# Altium PCB 1.28inchLCD_V1.1.PcbDoc
Units mil, origin at the board's own origin, x right, y up, seen from the top; angles counter-clockwise.
Board outline 1401.56 x 1489.37 mil, 2 copper layers (Top Layer, Bottom Layer); 11 components, 14 nets, 55 pads, 90 vias.
Unrouted connection lines stored in the file: 76.
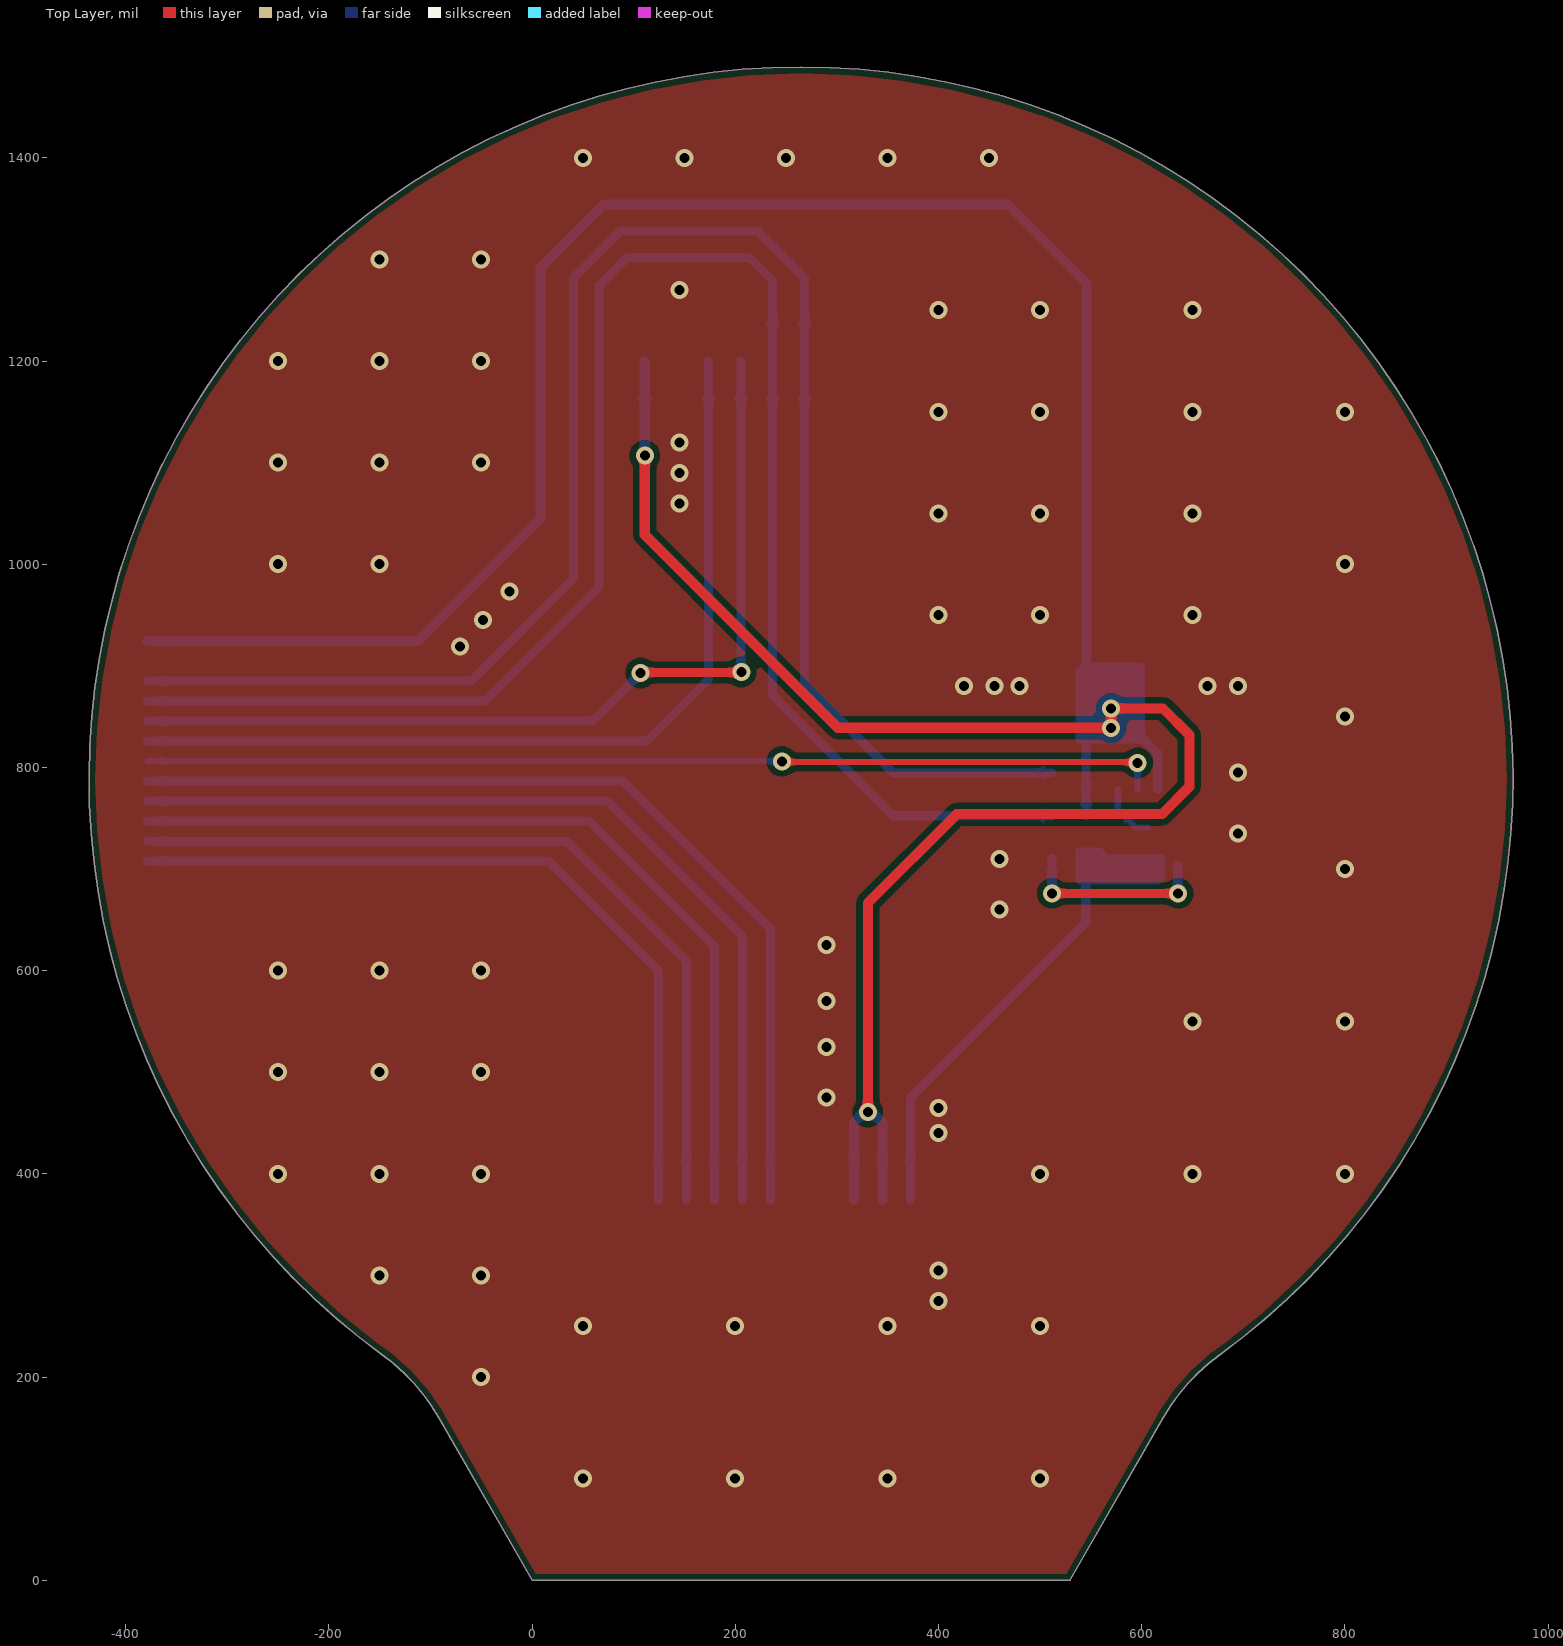
[diagram p0: Top Layer view]
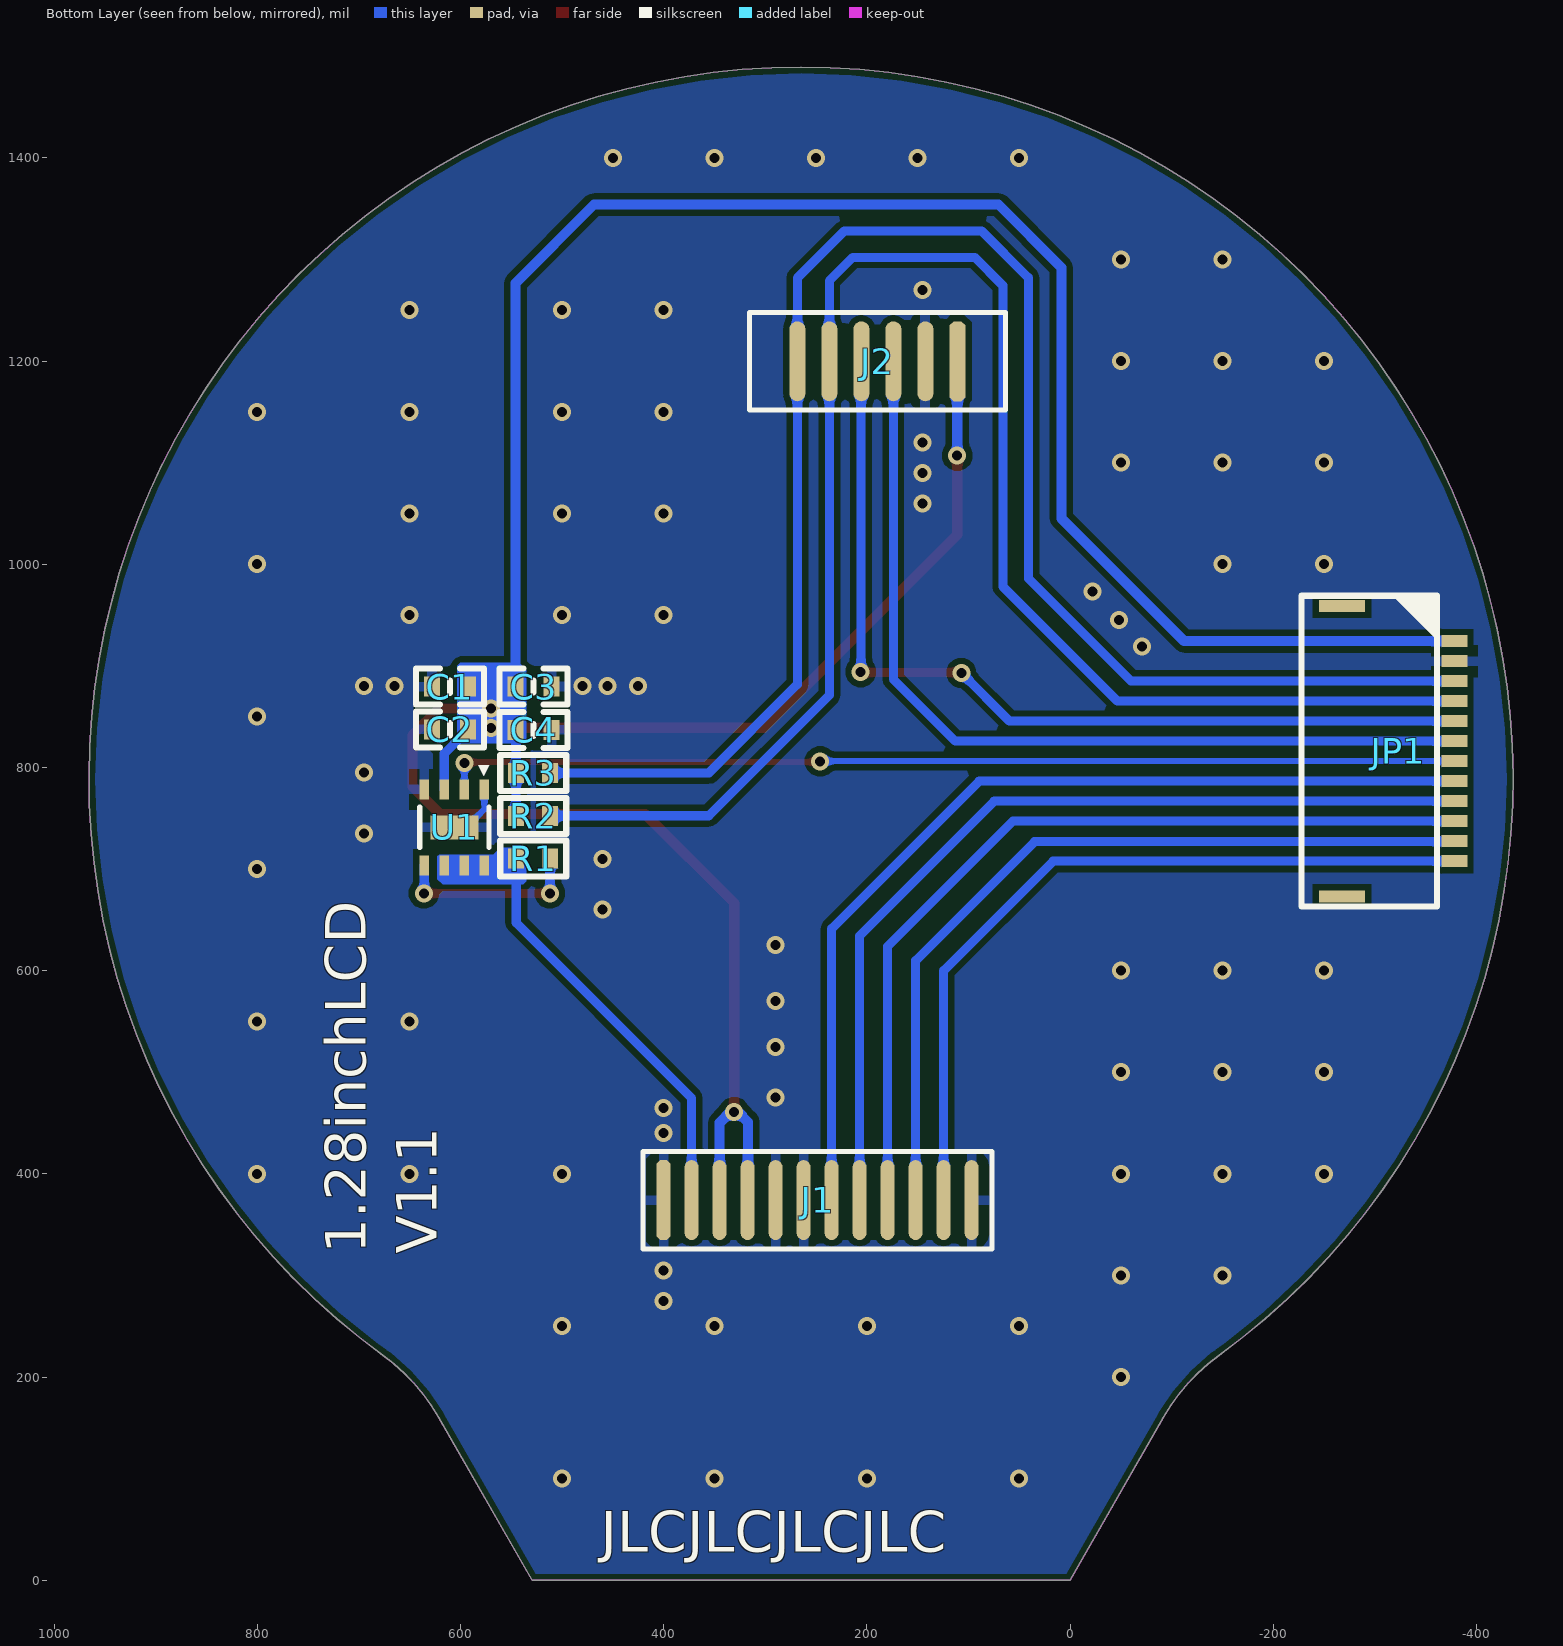
[diagram p1: Bottom Layer view, seen from below]
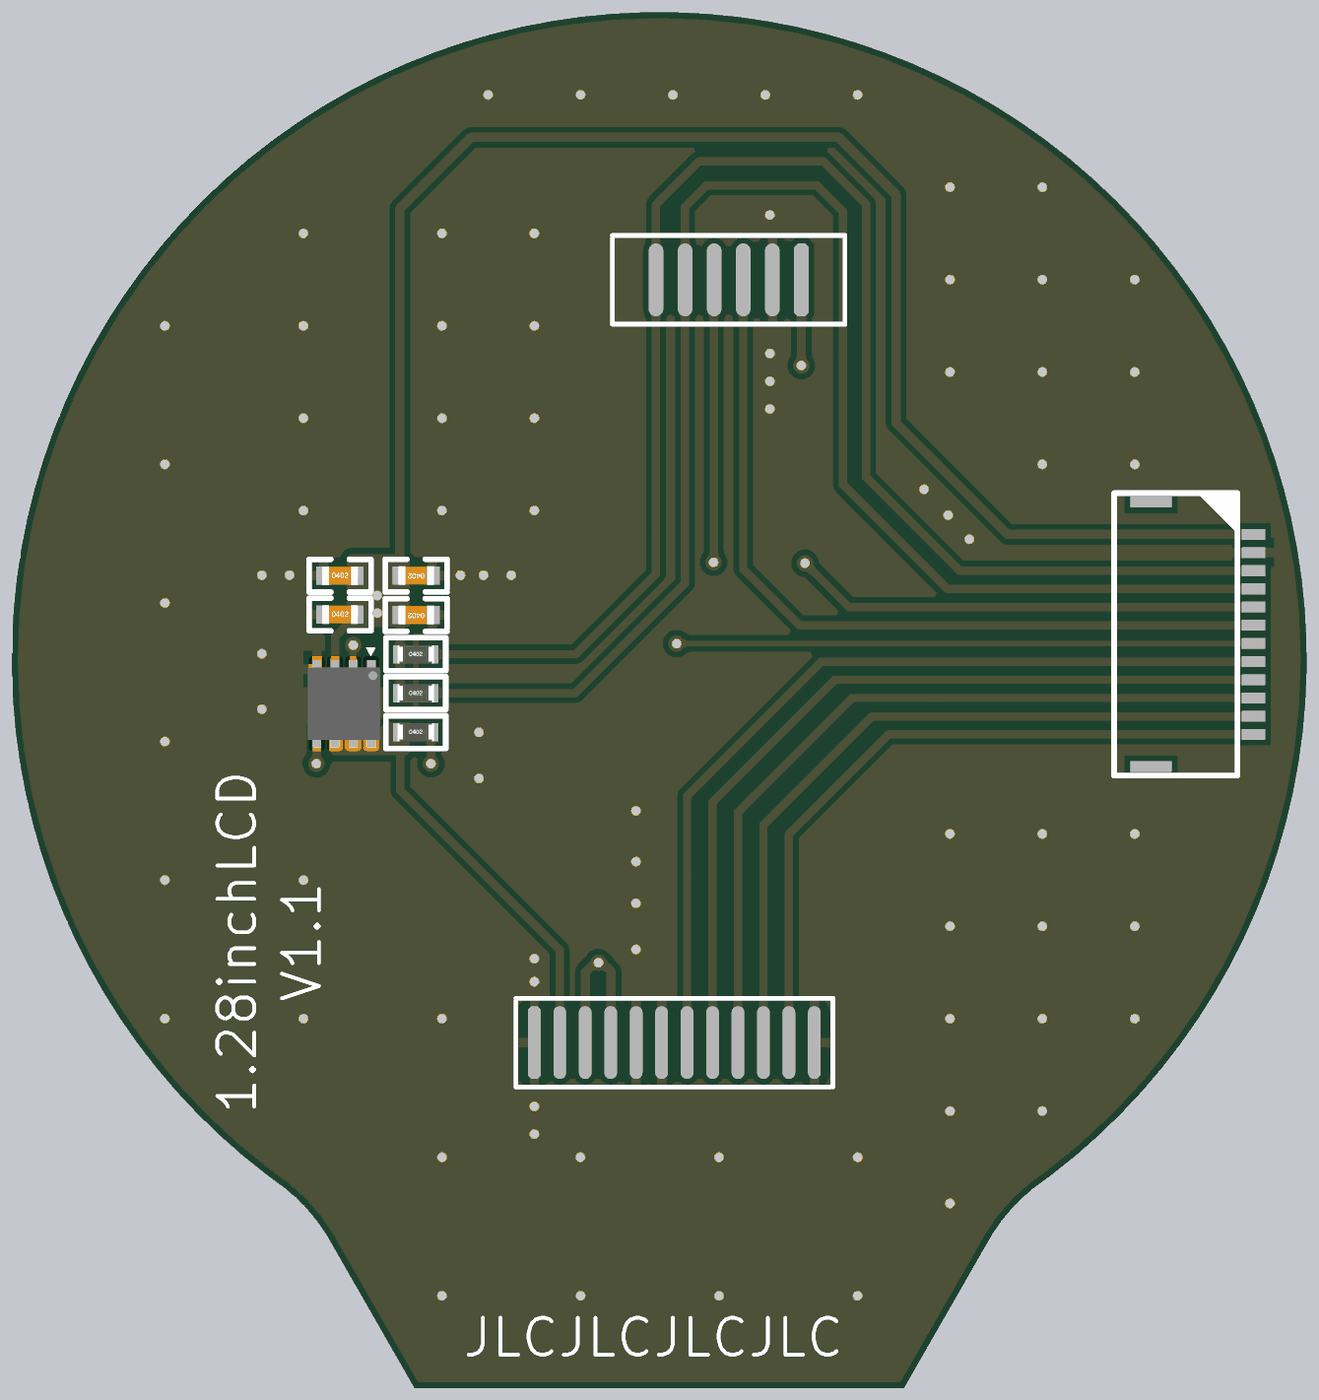
[diagram p2: 3D render of the assembled board from below, using the file's embedded part models]

## Layer stack, top to bottom
Top Solder: solder mask 0.4, Solder Resist, Dk 3.5
Top Layer: signal copper 1.4
Dielectric 1: dielectric 12.6, FR-4, Dk 4.8
Bottom Layer: signal copper 1.4
Bottom Solder: solder mask 0.4, Solder Resist, Dk 3.5

## Board outline
0,0 -91.81,160.1 ccw(c-262.58,62.18) -146.93,221.48 cw(c264.76,788.58) 676.46,221.48 ccw(c792.1,62.18) 621.34,160.1 529.53,0

## Design rules (kind name [scope] priority, off if disabled: settings)
Clearance [All] p1: gap=6 ignorepadtopadclearanceinfootprint=FALSE
HoleToHoleClearance [All] p1: gap=0 allowstackedmicrovias=TRUE
MinimumSolderMaskSliver [All] p1: minsoldermaskwidth=0
PolygonConnect [All] p1: thpad.connectstyle=Relief thpad.reliefconductorwidth=10 thpad.reliefentries=4 thpad.polygonreliefangle="90 Angle" thpad.airgapwidth=10 smdpad.connectstyle=Relief smdpad.reliefconductorwidth=10 smdpad.reliefentries=4 smdpad.polygonreliefangle="90 Angle" smdpad.airgapwidth=10 via.connectstyle=Direct via.reliefconductorwidth=10 via.reliefentries=4 via.polygonreliefangle="90 Angle" via.airgapwidth=10
RoutingVias [All] p1: holewidth=9.84 width=17.72 viastyle="Through Hole" minholewidth=9.84 minwidth=17.72 maxholewidth=23.62 maxwidth=31.5
SilkToSilkClearance [All] p1: silktosilkclearance=0
SilkToSolderMaskClearance [IsPad] p1: minsilkscreentomaskgap=0 clearancetoexposedcopper=TRUE
SolderMaskExpansion [IsVia] p1: expansion=4 istentingtop=TRUE useseparateexpansions=TRUE expansionbottom=4 istentingbottom=TRUE
Width [All] p1: maxlimit=30 minlimit=6 preferedwidth=6
26 further rules are at their usual default settings.

## Components (designator, comment, footprint, x,y, rotation, side; value= is the part's Value field where it differs from the comment)
C1 "4.7uF" C0402_L 610.32,879.47 r180 bottom
C2 "0.1uF" C0402_L 610.32,837.47 r180 bottom
C3 "4.7uF" C0402_L 527.97,879.62 r0 bottom
C4 "0.1uF" C0402_L 527.97,836.93 r0 bottom
J1 "1.28'LCD" 1.28‘LCD 248.43,374.14 r0 bottom
J2 "1.28'Touch" 1.28’Touch 189.57,1199.73 r0 bottom
JP1 "12P-FPC-1.0H" FPC05-10-12-RL-MA-G -323,816 r270 bottom
R1 "NC/0R" R0402_L 528.34,710.22 r180 bottom
R2 "4.7K" R0402_L 528.34,752.37 r180 bottom
R3 "4.7K" R0402_L 528.34,794.52 r180 bottom
U1 "AW9364DNR" DFN2X2-8L 606,741 r270 bottom

## Footprints (in the part's own frame and the unit in brackets; to place one, negate y for a bottom-side part, rotate by r counter-clockwise, add the part's x,y. Pads: shape width x height; smd on the part's side, far side on the other; paste and mask are expansions set on the pad)
1.28‘LCD [mm]
  oct 0.35x2 smd: 1(3.85,0)
  oval 0.35x2 smd: 2(3.15,0) 3(2.45,0) 4(1.75,0) 5(1.05,0) 6(0.35,0) 7(-0.35,0) 8(-1.05,0) 9(-1.75,0) 10(-2.45,0) 11(-3.15,0) 12(-3.85,0)
  silkscreen extent -4.36,-1.22 4.36,1.22
1.28’Touch [mm]
  oct 0.4x2 smd: 1(-2,0)
  oval 0.4x2 smd: 2(-1.2,0) 3(-0.4,0) 4(0.4,0) 5(1.2,0) 6(2,0)
  silkscreen extent -3.2,-1.22 3.2,1.22
C0402_L [mm] "无极性贴片电容"
  rect 0.4x0.5 smd: 1(-0.45,0) 2(0.45,0)
  silkscreen extent -0.85,-0.45 0.85,0.45, body extent -0.5,-0.26 0.5,0.26, height 0.54
DFN2X2-8L [mm]
  rect 0.5x0.24 smd mask+0.102: 1(-0.95,0.75) 2(-0.95,0.25) 3(-0.95,-0.25) 4(-0.95,-0.75) 5(0.95,-0.75) 6(0.95,-0.25) 7(0.95,0.25) 8(0.95,0.75)
  rect 0.6x1.2 smd mask+0.102: 9(0,0)
  silkscreen extent -1.55,-0.86 0.51,0.88, body extent -1,-1 1,1, height 0.75
FPC05-10-12-RL-MA-G [mm]
  rect 0.3x1.15 smd: 0(-3.635,-1.405) 0(3.635,-1.405)
  rect 0.3x0.65 smd: 1(-2.75,1.405) 2(-2.25,1.405) 3(-1.75,1.405) 4(-1.25,1.405) 5(-0.75,1.405) 6(-0.25,1.405) 7(0.25,1.405) 8(0.75,1.405) 9(1.25,1.405) 10(1.75,1.405) 11(2.25,1.405) 12(2.75,1.405)
  silkscreen extent -3.88,-2.42 3.88,0.97
R0402_L [mm] "1/16W贴片电阻"
  rect 0.4x0.5 smd: 1(-0.425,0) 2(0.425,0)
  silkscreen extent -0.82,-0.45 0.83,0.45, body extent -0.5,-0.25 0.5,0.25, height 0.3

## Part data
C1 C2 C3 C4: library part C, "贴片电容", BOM名称=无极性贴片电容, 联系卖家，免费查找封装=唯一出售店铺网址https://shop463601444.taobao.com
J1: "1.28寸焊接LCD屏（240*240）"
J2: "1.28寸触摸面板"
JP1: library part "Header 12", BOM名称=12P连接器, 联系卖家 免费技术支持=封装库来自淘宝卖家ID：黄晶宝石, 联系卖家 免费查找封装=唯一出售店铺网址https://shop463601444.taobao.com
R1 R2 R3: library part R, "贴片电阻", BOM名称=贴片电阻, 联系卖家，免费查找封装=唯一出售店铺网址https://shop463601444.taobao.com
U1: "并联调光背光驱动"

## Via types
v1: diameter 17.72, hole 9.84, Top Layer to Bottom Layer, tented both sides, 90 vias

## Nets (pads, with @x,y where several pads share a name; then routed paths per layer and width w, separated by ;. In a path a pad name is that pad's centre, name@x,y a point inside that pad or via, vN(x,y) a via of type N, cw(c..) or ccw(c..) an arc to the next point about the centre after c; other vN are vias at no path point)
GND: C1.1 C2.1 C3.1 C4.1 J1.1 J1.5 J1.6 J1.12 J2.2 JP1.2 U1.1 U1.4 U1.9 | length 56.6
  Bottom Layer w6: U1.1 576.47,758.72 594.19,741 U1.9
  other v1: 50,100 200,100 350,100 500,100 -50,200 50,250 200,250 350,250 500,250 400,275 -150,300 -50,300 400,305 -250,400 -150,400 -50,400 500,400 650,400 800,400 400,440 400,465 290,475 -250,500 -150,500 -50,500 290,525 650,550 800,550 290,570 -250,600 -150,600 -50,600 290,625 460,660 800,700 460,710 695,735 695,795 800,850 425,880 455,880 480,880 665,880 695,880 -71,919 -48,945 400,950 500,950 650,950 -22,973 -250,1000 -150,1000 800,1000 400,1050 500,1050 650,1050 145,1060 145,1090 -250,1100 -150,1100 -50,1100 145,1120 400,1150 500,1150 650,1150 800,1150 -250,1200 -150,1200 -50,1200 400,1250 500,1250 650,1250 145,1270 -150,1300 -50,1300 50,1400 150,1400 250,1400 350,1400 450,1400
LCD_BL: JP1.7 U1.2 | length 1001.1
  Top Layer w6: v1(246,806) 246.82,805.18 595.24,805.18 v1(596.06,804.36)
  Bottom Layer w6: JP1.7 245.84,806.16 v1(246,806) ; v1(596.06,804.36) 596.11,804.31 596.11,778.45 U1.2
LCD_CS: J1.8 JP1.9 | length 900.4
  Bottom Layer w9: JP1.9 74.54,766.79 207.09,634.24 J1.8
LCD_DC: J1.7 JP1.8 | length 940.2
  Bottom Layer w9: JP1.8 89.32,786.47 234.65,641.15 J1.7
LCD_RST: J1.11 JP1.12 | length 773.1
  Bottom Layer w9: JP1.12 16.58,707.73 124.41,599.9 J1.11
LCD_SCL: J1.9 JP1.10 | length 858.6
  Bottom Layer w9: JP1.10 56.23,747.1 179.53,623.81 J1.9
LCD_SDA: J1.10 JP1.11 | length 814.7
  Bottom Layer w9: JP1.11 -377.9,727 34.83,727 151.97,609.86 J1.10
NetR1_2: R1.2 U1.5 | length 186.2
  Top Layer w9: v1(512,676) v1(636,676)
  Bottom Layer w9: R1.2 511.8,710.02 511.8,676.2 v1(512,676) ; U1.5 635.53,676.47 v1(636,676)
TP_INT: J2.4 JP1.5 | length 910.4
  Top Layer w9: v1(107,893) 107.5,893.5 205.5,893.5 v1(206,894)
  Bottom Layer w9: JP1.5 59.53,845.53 v1(107,893) ; J2.4 205.66,1199.39 205.66,894.34 v1(206,894)
TP_RST: J2.3 JP1.6 | length 890.3
  Bottom Layer w9: JP1.6 112.84,825.84 173.82,886.82 J2.3
TP_SCL: J2.6 JP1.3 R3.2 | length 1702.2
  Bottom Layer w9: JP1.3 -60.1,884.9 41,986 41,1282.01 86.99,1328 222.03,1328 268.31,1281.72 J2.6 268.31,881.69 355.48,794.52 R3.2
TP_SDA: J2.5 JP1.4 R2.2 | length 1710.8
  Bottom Layer w9: JP1.4 -46.79,865.21 66,978 66,1274.21 93.79,1302 213.67,1302 236.81,1278.86 J2.5 236.81,871.19 355.63,752.37 R2.2
VCC_3V3: C1.2 C2.2 C3.2 C4.2 J1.3 J1.4 J2.1 JP1.1 R2.1 R3.1 U1.3 | length 3455.6
  Top Layer w10: v1(111,1107) 111,1028.89 300.89,839 v1(570,839) v1(570,858) 621,858 647,832 647,781 620,754 418,754 330.54,666.54 v1(330.54,460.61)
  Bottom Layer w9: R2.1 545.37,752.68 R3.1@545.37,794.82 ; R3.1 R3.1@545.37,794.82 ; C4.2 545.37,836.62 R3.1@545.37,794.82 ; C2.2 592.6,835.5 595.98,832.13 597.25,832.13 615.84,813.53 U1.3
  Bottom Layer w10: JP1.1 -112.34,924.27 8.48,1045.09 8.48,1292.1 70.38,1354 468.5,1354 545.68,1276.82 C3.2 ; J2.1 110.91,1199.65 110.91,1107.09 v1(111,1107) ; J1.4@316.87,374.6 316.87,451.08 326.4,460.61 v1(330.54,460.61) 334.68,460.61 344.88,450.41 J1.3
VLED_K: J1.2 R1.1 U1.6 U1.7 U1.8 | length 407.6
  Bottom Layer w9: J1.2 372.44,474.44 545.07,647.07 R1.1
pads on no net: JP1.0

## Polygon pours and split planes (outlines as drawn)
GND on Top Layer "GND_L01_P000" (solid, remove dead copper, pour order 0): -460,1510 -460,-20 980,-20 980,1510
GND on Bottom Layer "GND_L02_P001" (solid, remove dead copper, pour order 1): -460,1510 -460,-20 980,-20 980,1510

## Keep-outs
Keep-Out Layer:
  lines w0.5: -146.93,221.48 cw(c-262.58,62.18) -91.81,160.1 0,0 264.76,0 529.53,0 621.34,160.1 cw(c792.1,62.18) 676.46,221.48 ccw(c264.76,788.58) -146.93,221.48

## Other copper
Bottom Layer:
  region net VLED_K: 535,688 535,719.68 536.37,721.05 560.41,721.05 567.02,714.44 567.18,714.28 620.83,714.28 622.56,712.56 622.56,690.07 617.49,685 538,685
  region net VCC_3V3: 535,826 537,824 601,824 603,826 603,900 600,903 542,903 535,896

## Silkscreen, mask and mechanical layers (free items; w line width, h text height)
Bottom Overlay:
  text "V1.1" at 623.05,321.13 h40 r270
  text "1.28inchLCD" at 693.05,321.13 h40 r270
  text "JLCJLCJLCJLC" at 462.1,28 h40
Mechanical 1:
  lines w0.5: -146.93,221.48 cw(c-262.58,62.18) -91.81,160.1 0,0 264.76,0 529.53,0 621.34,160.1 cw(c792.1,62.18) 676.46,221.48 ccw(c264.76,788.58) -146.93,221.48
Mechanical 4:
  lines w0.5: 60.63,366.14 436.22,366.14 ; 60.63,1191.73 318.5,1191.73 ; 189.57,1152.36 189.57,1231.1 ; 248.43,324.8 248.43,407.48 ; -146.93,221.48 cw(c264.76,788.58) 676.46,221.48 ccw(c792.1,62.18) 621.34,160.1 529.53,0 264.76,0 0,0 -91.81,160.1 ccw(c-262.58,62.18) -146.93,221.48 ; 60.63,324.8 60.63,407.48 436.22,407.48 436.22,324.8 60.63,324.8 ; 60.63,1152.36 318.5,1152.36 318.5,1231.1 60.63,1231.1 60.63,1152.36